# Altium PCB Machsac.PcbDoc
Units mil, origin at the board's own origin, x right, y up, seen from the top; angles counter-clockwise.
Board outline 6000 x 4000 mil, 2 copper layers (Top Layer, Bottom Layer); 41 components, 15 nets, 97 pads, 1 vias.
Unrouted connection lines stored in the file: 12.
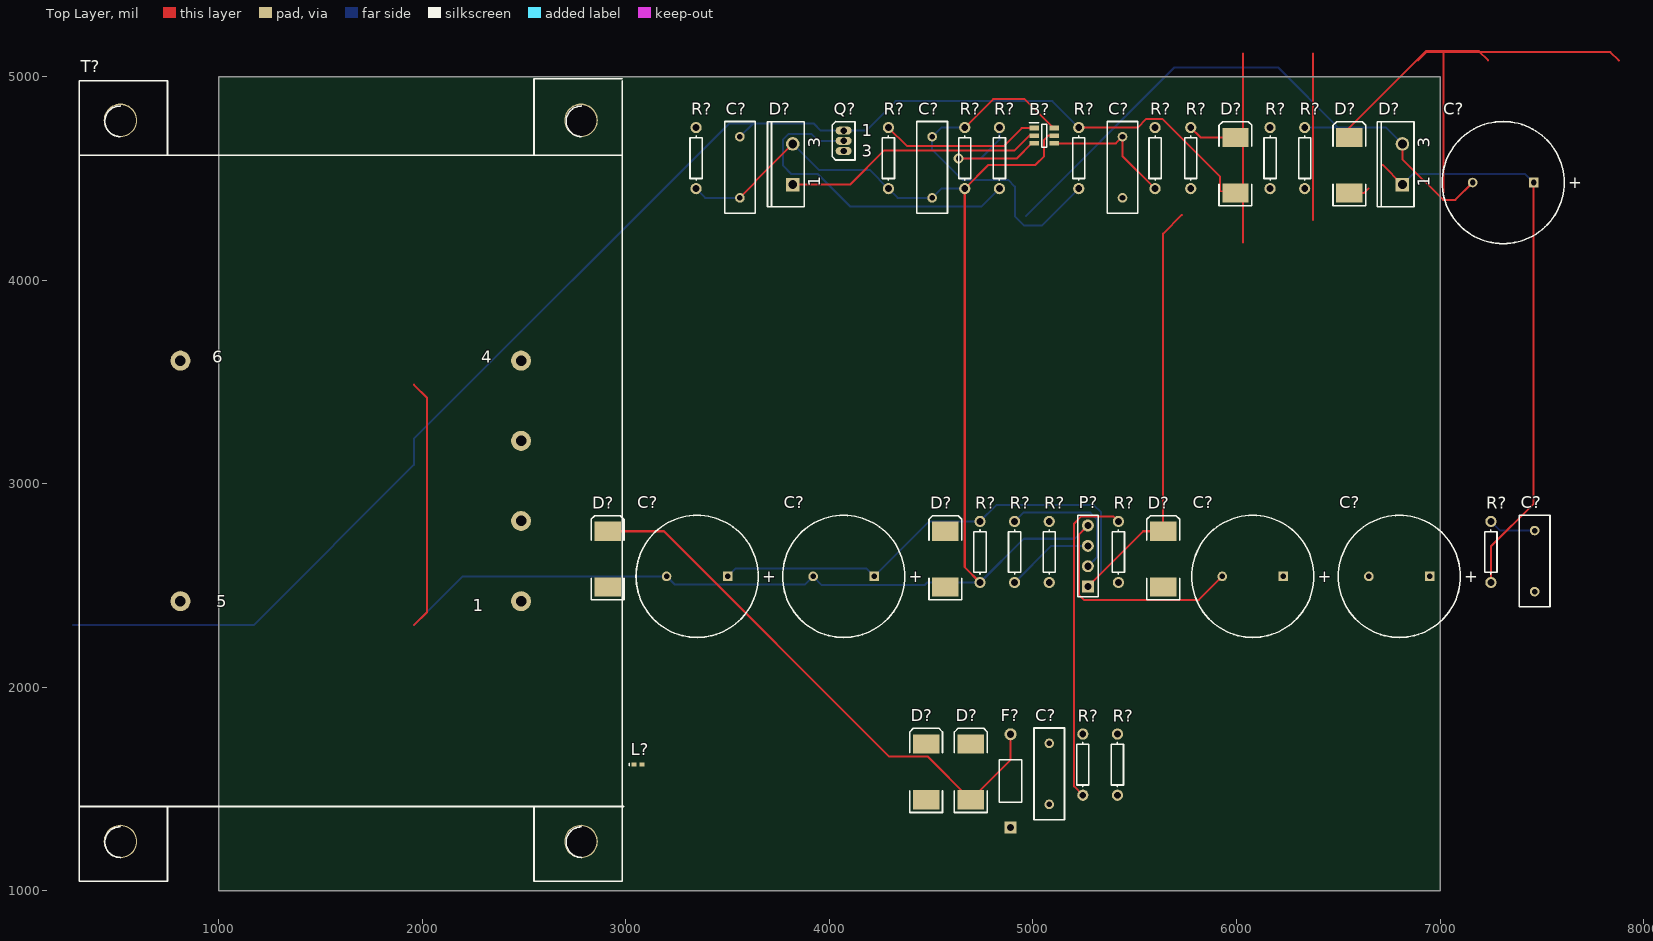
[diagram p0: Top Layer view]
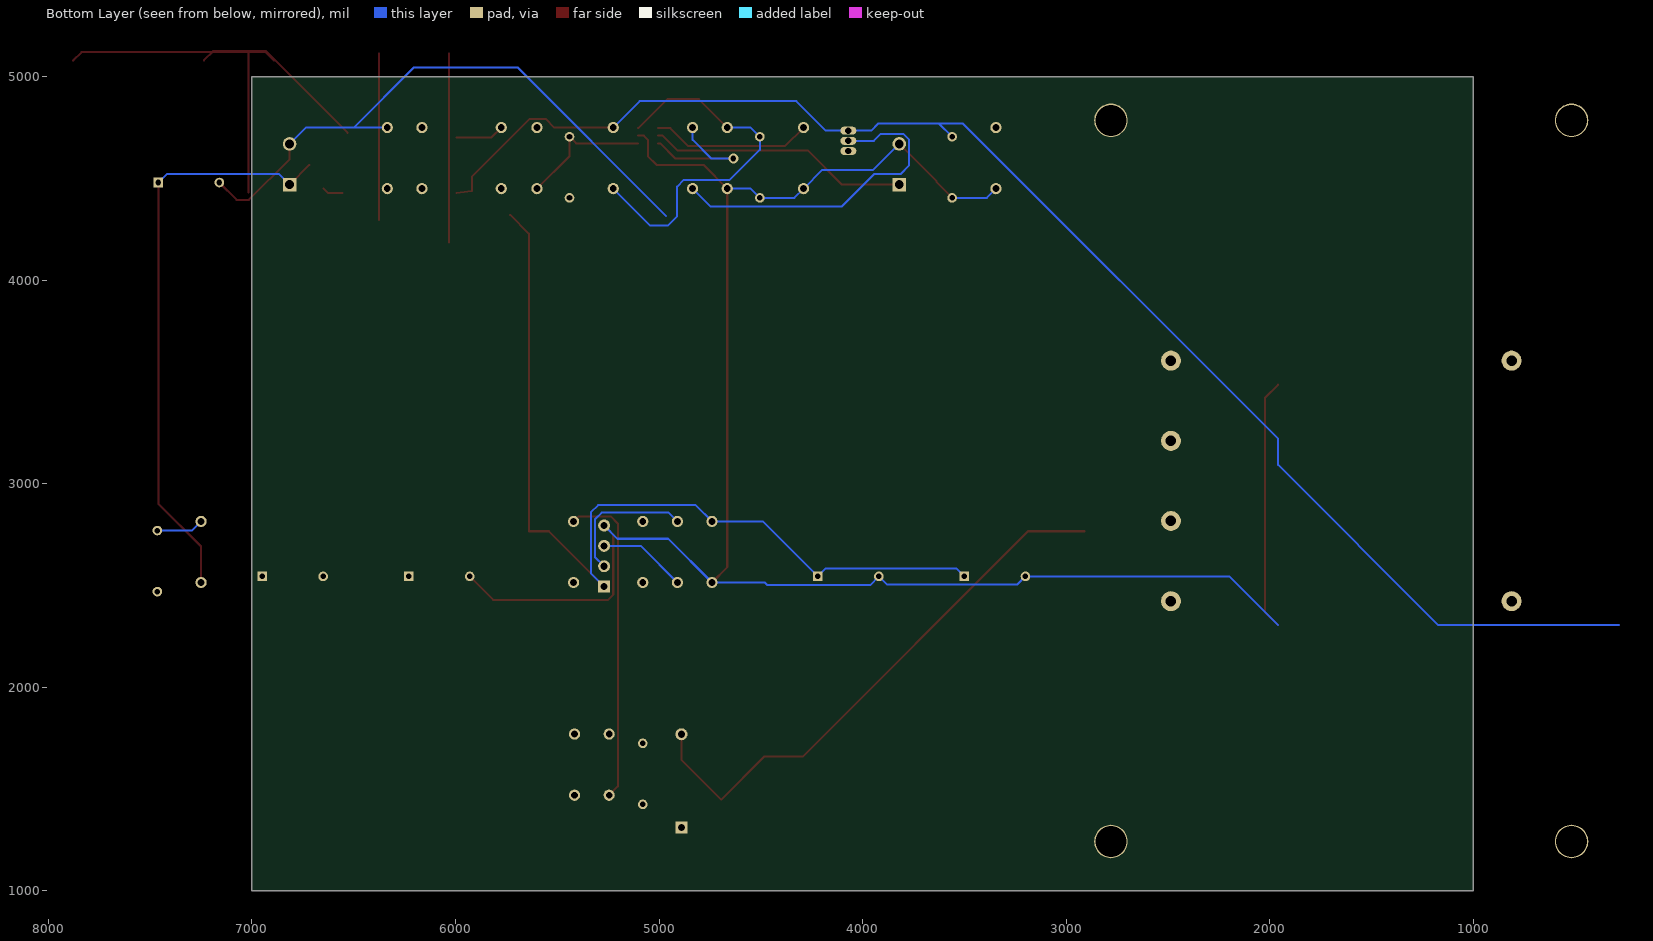
[diagram p1: Bottom Layer view, seen from below]

## Layer stack, top to bottom
Top Solder: solder mask 0.4, Solder Resist, Dk 3.5
Top Layer: signal copper 1.4
Dielectric 1: dielectric 12.6, FR-4, Dk 4.8
Bottom Layer: signal copper 1.4
Bottom Solder: solder mask 0.4, Solder Resist, Dk 3.5

## Board outline
1000,1000 7000,1000 7000,5000 1000,5000

## Design rules (kind name [scope] priority, off if disabled: settings)
Clearance [All] p1: gap=10 ignorepadtopadclearanceinfootprint=FALSE except(0: Arc-Hole Track-Hole SMDPad-Hole THPad-Hole Via-Hole Fill-Hole Poly-Hole Region-Hole Text-Hole)
PolygonConnect [All] p1: connectstyle=Relief reliefconductorwidth=10 reliefentries=4 polygonreliefangle="90 Angle" airgapwidth=10
RoomDefinition Machsac [InComponentClass('Machsac')] p1: confinementstyle=ConfineIn formatcopy=TRUE lockcomponents=FALSE outline 80,900 7860,900 7860,5130 80,5130
RoutingVias [All] p1: holewidth=28 width=50 viastyle="Through Hole" minholewidth=28 minwidth=50 maxholewidth=28 maxwidth=50
SolderMaskExpansion [All] p1: expansion=4 istentingtop=FALSE
Width [All] p1: maxlimit=10 minlimit=10 preferedwidth=10
30 further rules are at their usual default settings.

## Classes and differential pairs
component class Machsac: B? C? D? F? L? P? Q? R? T?

## Components (designator, comment, footprint, x,y, rotation, side; value= is the part's Value field where it differs from the comment)
B? "UCC28700DBVT" SOT95P280X145-6N 5055,4710 r0 top
C? "Cap Pol1" RB7.6-15 6800,2545 r0 top value=100pF
C? "Cap" RAD-0.3 3560,4555 r90 top value=100pF
C? "Cap" RAD-0.3 7465,2620 r90 top value=100pF
C? "Cap" RAD-0.3 5080,1575 r90 top value=100pF
C? "Cap" RAD-0.3 5440,4555 r90 top value=100pF
C? "" RB7.6-15 3350,2545 r0 top value=100pF
C? "" RB7.6-15 7310,4480 r0 top value=100pF
C? "" RB7.6-15 4070,2545 r0 top value=100pF
C? "Cap" RAD-0.3 4505,4555 r90 top value=100pF
C? "Cap Pol1" RB7.6-15 6080,2545 r0 top value=100pF
D? "Diode" SMC 2910,2630 r90 top
D? "Diode" SMC 4475,1585 r90 top
D? "DIODE" TO-220AC 3820,4570 r90 top
D? "Diode" SMC 4695,1585 r90 top
D? "DIODE" TO-220AC 6815,4570 r90 top
D? "Diode" SMC 6555,4565 r90 top
D? "Diode" SMC 5640,2630 r90 top
D? "Diode" SMC 5995,4565 r90 top
D? "Diode" SMC 4570,2630 r90 top
F? "Fuse 2" PIN-W2/E2.8 4890,1540 r90 top
L? "Inductor" 0402-A 3060,1620 r0 top value=10mH
P? "Header 4" HDR1X4 5270,2495 r90 top
Q? "AOU1N60" E3 4070,4685 r0 top
R? "Res1" AXIAL-0.3 4290,4600 r90 top value=1K
R? "Res1" AXIAL-0.3 3345,4600 r90 top value=1K
R? "Res1" AXIAL-0.3 5080,2665 r90 top value=1K
R? "Res1" AXIAL-0.3 4835,4600 r90 top value=1K
R? "Res1" AXIAL-0.3 4910,2665 r90 top value=1K
R? "Res1" AXIAL-0.3 6165,4600 r90 top value=1K
R? "Res1" AXIAL-0.3 5600,4600 r90 top value=1K
R? "Res1" AXIAL-0.3 5420,2665 r90 top value=1K
R? "Res1" AXIAL-0.3 4740,2665 r90 top value=1K
R? "Res1" AXIAL-0.3 5415,1620 r90 top value=1K
R? "Res1" AXIAL-0.3 7250,2665 r90 top value=1K
R? "Res1" AXIAL-0.3 4665,4600 r90 top value=1K
R? "Res1" AXIAL-0.3 5225,4600 r90 top value=1K
R? "Res1" AXIAL-0.3 5245,1620 r90 top value=1K
R? "Res1" AXIAL-0.3 5775,4600 r90 top value=1K
R? "Res1" AXIAL-0.3 6335,4600 r90 top value=1K
T? "Trans3" TRF_6 1648.33,3014.17 r0 top

## Footprints (in the part's own frame and the unit in brackets; to place one, negate y for a bottom-side part, rotate by r counter-clockwise, add the part's x,y. Pads: shape width x height; smd on the part's side, far side on the other; paste and mask are expansions set on the pad)
0402-A [mm] "Chip Inductor, Body 1.0x0.5mm, IPC High Density"
  rect 0.6x0.5 smd: 1(-0.5,0) 2(0.5,0)
  silkscreen extent -1.1,-0.15 -1.1,0.15, body extent -0.55,-0.3 0.55,0.3, height 0.55
AXIAL-0.3 [mm] "Axial Device, Thru-Hole; 2 Leads; 0.3 in Pin Spacing"
  round 1.4 hole 0.85: 1(-3.81,0) 2(3.81,0)
  silkscreen extent -2.77,-0.76 2.77,0.76
E3 [mm] "TO, Flat Index; 3 In-Line, Axial Leads; Body Dia. 4.6mm; Lead Dia. 0.5 mm (max)"
  oval 2x1 hole 0.8: 1(0,1.27) 2(0,0) 3(0,-1.27)
  silkscreen extent -1.41,-2.41 1.41,2.41
HDR1X4 [mm] "Connector; Header; 4 Position"
  rect 1.5x1.5 hole 0.9: 1(0,0)
  round 1.5 hole 0.9: 2(2.54,0) 3(5.08,0) 4(7.62,0)
  silkscreen extent -1.27,-1.27 8.89,1.27
PIN-W2/E2.8 [mm] "Thru-Hole; 2 Leads"
  rect 1.5x1.5 hole 0.9: 1(-5.825,0)
  round 1.5 hole 0.9: 2(5.825,0)
  silkscreen extent -2.65,-1.4 2.65,1.4
RAD-0.3 [mm] "Radial Cap, Thru-Hole; 2 Leads; 0.3 in Pin Spacing"
  round 1.2 hole 0.7: 1(-3.81,0) 2(3.81,0)
  silkscreen extent -5.71,-1.91 5.71,1.91
RB7.6-15 [mm] "Polarized Capacitor (Radial); 2 Leads"
  rect 1.2x1.2 hole 0.7: 1(3.81,0)
  round 1.2 hole 0.7: 2(-3.81,0)
  silkscreen extent -7.62,-7.62 7.62,7.62
SMC [mm] "DO-214-AB/SMC; 2 C-Bend Leads; Body 7.9 x 5.9 mm, inc. leads (LxW)"
  rect 2.4x3.3 smd: 1(-3.475,0) 2(3.475,0)
  silkscreen extent -5.08,-2.05 5.42,2.06
SOT95P280X145-6N [mm]
  rect 1.2x0.6 smd: 1(-1.25,0.95) 2(-1.25,0) 3(-1.25,-0.95) 4(1.25,-0.95) 5(1.25,0) 6(1.25,0.95)
  silkscreen extent -1.85,-1.45 0.3,1.6
TO-220AC [mm] "TO, Thru-Hole, Vertical, Heatsink Mounted; 3 In-Line Leads (1 Absent); Pitch 2.54 mm"
  rect 1.7x1.7 hole 1.1: 1(-2.54,0)
  round 1.7 hole 1.1: 3(2.54,0)
  silkscreen extent -5.3,-1.45 5.3,3.15
TRF_6 [mil] "Transformer; 6 Leads"
  round 98 hole 52: 1(836.67,-590.83) 2(836.67,-196.67) 3(836.67,196.67) 4(836.67,590.83) 5(-836.67,-590.83) 6(-836.67,590.83)
  round 165 hole 152: MH1(-1131.67,-1771.67) MH2(1131.67,-1771.67) MH3(1131.67,1771.67) MH4(-1131.67,1771.67)
  silkscreen extent -1333,-1967 1342,1975

## Part data
B?: "Texas Instruments UCC28700DBVT, PWM Controller, 140 kHz, 6-Pin, SOT-23", Manufacturer_Name="Texas Instruments", Mouser Part Number=595-UCC28700DBVT, Arrow Part Number=UCC28700DBVT, Arrow Price/Stock=https://www.arrow.com/en/products/ucc28700dbvt/texas-instruments?region=nac, Datasheet Link=http://www.ti.com/lit/gpn/ucc28700, Geometry.Height=1.45mm, Manufacturer_Part_Number=UCC28700DBVT, Mouser Price/Stock=https://www.mouser.co.uk/ProductDetail/Texas-Instruments/UCC28700DBVT?qs=4whTb%2F0XQMhVrkFqriHNXg%3D%3D
C? C?: "Polarized Capacitor (Radial)", LatestRevisionDate=17-Jul-2002, LatestRevisionNote="Re-released for DXP Platform.", PackageDescription="Polarized Capacitor (Radial); 2 Leads", PackageReference=RB7.6-15, Published=8-Jun-2000, Publisher="Altium Limited"
C? C? C? C? C?: "Capacitor", LatestRevisionDate=17-Jul-2002, LatestRevisionNote="Re-released for DXP Platform.", PackageDescription="Radial Cap, Thru-Hole; 2 Leads; 0.3 in Pin Spacing", PackageReference=RAD-0.3, Published=8-Jun-2000, Publisher="Altium Limited"
C? C? C?: library part "Cap Pol1", "Polarized Capacitor (Radial)", LatestRevisionDate=17-Jul-2002, LatestRevisionNote="Re-released for DXP Platform.", PackageDescription="Polarized Capacitor (Radial); 2 Leads", PackageReference=RB7.6-15, Published=8-Jun-2000, Publisher="Altium Limited"
D? D? D? D? D? D? D?: "Default Diode", Code_JEDEC=DO-214-AB, LatestRevisionDate=17-Jul-2002, LatestRevisionNote="Re-released for DXP Platform.", PackageDescription="DO-214-AB/SMC; 2 C-Bend Leads; Body 7.9 x 5.9 mm, inc. leads (LxW)", PackageReference=SMC, PackageVersion=Sep-1996, Published=8-Jun-2000, Publisher="Altium Limited"
D? D?: library part "Diode 10TQ035", "Schottky Rectifier", ComponentLink1Description="Manufacturer Link", ComponentLink1URL=http://www.irf.com/, ComponentLink2Description=Datasheet, ComponentLink2URL=http://www.irf.com/product-info/datasheets/data/10tq.pdf, DatasheetVersion=PD-2.057B, LatestRevisionDate=17-Jul-2002, LatestRevisionNote="Re-released for DXP Platform.", Note="Terminal 2 is the TAB and is electrically connected to the cathode", PackageDescription="TO, Thru-Hole, Vertical, Heatsink Mounted; 3 In-Line Leads (1 Absent); Pitch 2.54 mm", PackageReference=TO-220AC, PackageVersion=Feb-1998, Published=8-Jun-2000, Publisher="Altium Limited"
F?: "Fuse", LatestRevisionDate=17-Jul-2002, LatestRevisionNote="Re-released for DXP Platform.", PackageDescription="Thru-Hole; 2 Leads", PackageReference=PIN-W2/E2.8, Published=8-Jun-2000, Publisher="Altium Limited"
P?: "Header, 4-Pin", LatestRevisionDate=17-Jul-2002, LatestRevisionNote="Re-released for DXP Platform.", Publisher="Altium Limited"
Q?: library part MOSFET-N, "N-Channel MOSFET", LatestRevisionDate=17-Jul-2002, LatestRevisionNote="Re-released for DXP Platform.", PackageDescription="TO, Flat Index; 3 In-Line, Axial Leads; Body Dia. 4.6mm; Lead Dia. 0.5 mm (max)", PackageReference=E3, PackageVersion=1995/1996, Published=8-Jun-2000, Publisher="Altium Limited"
R? R? R? R? R? R? R? R? R? R? R? R? R? R? R? R?: "Resistor", LatestRevisionDate=17-Jul-2002, LatestRevisionNote="Re-released for DXP Platform.", PackageDescription="Axial Device, Thru-Hole; 2 Leads; 0.3 in Pin Spacing", PackageReference=AXIAL-0.3, Published=8-Jun-2000, Publisher="Altium Limited"
T?: "Three-winding Transformer (Non-Ideal)", LatestRevisionDate=17-Jul-2002, LatestRevisionNote="Re-released for DXP Platform.", PackageDescription="Transformer; 6 Leads", PackageReference=TRF_6, Published=25-Jan-2001, Publisher="Altium Limited", Sim Note="Enter the turns ratios, Core loss resistance, Magnetising Reactance, Leakage Reactances and Resistances referred to the primary side into the parameter fields."
L?: Code_IEC=1005, Code_JEITA=0402, LatestRevisionDate=29-May-2009, LatestRevisionNote="IPC-7351 Footprint Added.", PackageDescription="Chip Inductor", PackageReference=0402-A, Published=8-Jun-2000, Publisher="Altium Limited"

## Via types
v1: diameter 50, hole 28, Top Layer to Bottom Layer, 1 vias

## Nets (pads, with @x,y where several pads share a name; then routed paths per layer and width w, separated by ;. In a path a pad name is that pad's centre, name@x,y a point inside that pad or via, vN(x,y) a via of type N, cw(c..) or ccw(c..) an arc to the next point about the centre after c; other vN are vias at no path point)
A1: C?.2@3560,4705 D?.1@5995,4428.19 D?.1@6555,4428.19 Q?.1 R?.2@5225,4750 T?.3 T?.5 | length 9045.5
  Top Layer w10: R?.2@5225,4750 5514,4750 5557,4793 5636,4793 5669.5,4759.5 5920,4509 5920,4438.19 D?.1@5995,4428.19 ; 6376,4296.19 6376,5115 ; 6529.5,4724.5 6930,5125 7191,5125 7236,5080 ; D?.1@6555,4428.19 6626.19,4428.19 6648,4450
  Bottom Layer w10: 285,2305.15 1170.83,2305.15 1958.33,3092.64 1958.33,3221.31 3507.02,4770 3625,4770 ; C?.2@3560,4705 3625,4770 ; R?.2@5225,4750 5095,4880 4325,4880 4180,4735 Q?.1 3958,4735 3923,4770 3625,4770
GND: B?.5 C?.1@3560,4405 C?.1@4505,4405 C?.2@3200,2545 C?.2@3920,2545 C?.2@5930,2545 C?.2@7160,4480 D?.3 P?.4 R?.1@3345,4450 R?.1@4290,4450 R?.1@4665,4450 R?.1@4740,2515 R?.2@6335,4750 T?.1 T?.4 | length 13089.7
  Top Layer w10: 1958.33,2305.15 2023,2369.81 2023,3422.14 1958.33,3486.81 ; C?.1@3560,4405 3638,4483 3638,4488 D?.3@3820,4670 ; R?.1@4740,2515 4665,2590 4665,4450 4781,4566 5011,4566 5055,4610 5055,4690 5075,4710 B?.5 ; P?.4 5225,2750 5225,2455 5250,2430 5815,2430 C?.2@5930,2545 ; D?.3@6815,4670 6815,4595 7015,4395 7075,4395 C?.2@7160,4480
  Bottom Layer w10: 1958.33,2305.15 2198.19,2545 3200,2545 3239,2506 3881,2506 3920,2545 3963,2502 4467,2502 4480,2515 4740,2515 4955,2730 5205,2730 P?.4 ; R?.1@3345,4450 3390,4405 C?.1@3560,4405 ; D?.3@3820,4670 3947.84,4542.16 4197.84,4542.16 4290,4450 4335,4405 4505,4405 4550,4450 R?.1@4665,4450 ; 4965,4315 5695,5045 6205,5045 6500,4750 ; R?.2@6335,4750 6500,4750 ; D?.3@6815,4670 6735,4750 6500,4750
NetB?_1: B?.1 R?.2@4290,4750 | length 790.5
  Top Layer w10: R?.2@4290,4750 4381.45,4658.55 4856.14,4658.55 4945,4747.4 B?.1
NetB?_2: B?.2 D?.1@3820,4470 | length 1285.2
  Top Layer w10: D?.1@3820,4470 4101,4470 4269,4638 4910,4638 4982,4710 B?.2
NetB?_3: B?.3 R?.2@4835,4750 | length 699.8
  Top Layer w10: v1(4635,4598) 4919.4,4598 4994,4672.6 B?.3
  Bottom Layer w10: v1(4635,4598) 4743,4598 4835,4690 R?.2@4835,4750
NetB?_4: B?.4 C?.2@5440,4705 R?.1@5600,4450 | length 670.5
  Top Layer w10: B?.4 5407.6,4672.6 5440,4705 5440,4610 R?.1@5600,4450
NetB?_6: B?.6 C?.2@4505,4705 R?.1@5225,4450 R?.2@4665,4750 | length 1833.7
  Top Layer w10: R?.2@4665,4750 4805,4890 4959,4890 5101.6,4747.4 B?.6
  Bottom Layer w10: R?.2@4665,4750 4550,4750 4505,4705 4505,4641 4653,4493 4878,4493 4911,4460 4911,4315 4958,4268 5043,4268 R?.1@5225,4450
NetC?_1: C?.1@3500,2545 C?.1@4220,2545 C?.1@7460,4480 D?.1@6815,4470 D?.2@5640,2766.81 P?.1 R?.1@7250,2515 R?.2@4740,2815 | length 9998.5
  Top Layer w10: P?.1 5541.81,2766.81 5640,2766.81 5640,4229 5732,4321 ; 6032,4186 6032,5115 ; 6718,4567 D?.1@6815,4470 ; 6892,5080 6933,5121 7837,5121 7878,5080 ; 7018,4432 7018,5115 ; R?.1@7250,2515 7250,2692 7460,2902 C?.1@7460,4480
  Bottom Layer w10: C?.1@3500,2545 3539,2584 4181,2584 4220,2545 4490,2815 4740,2815 4820,2895 5299.06,2895 5334.53,2859.53 5334.53,2559.53 P?.1 ; D?.1@6815,4470 6868,4523 7417,4523 C?.1@7460,4480
NetC?_2: C?.2@7465,2770 R?.2@7250,2815 | length 233.6
  Bottom Layer w10: R?.2@7250,2815 7295,2770 C?.2@7465,2770
NetD?_1: D?.1@4695,1448.19 D?.2@2910,2766.81 F?.2 | length 2733.1
  Top Layer w10: D?.2@2910,2766.81 3187.19,2766.81 4295,1659 4484.19,1659 4695,1448.19 4890,1643.19 F?.2
NetD?_2: D?.2@5995,4701.81 R?.2@5775,4750 | length 240
  Top Layer w10: R?.2@5775,4750 5823.19,4701.81 D?.2@5995,4701.81
NetP?_2: P?.2 R?.2@4910,2815 | length 684.5
  Bottom Layer w10: R?.2@4910,2815 4953,2858 5281.53,2858 5314.53,2825 5314.53,2639.53 P?.2
NetP?_3: P?.3 R?.1@4910,2515 | length 434.6
  Bottom Layer w10: R?.1@4910,2515 5090,2695 P?.3
NetQ?_2: Q?.2 R?.1@4835,4450 | length 1634.4
  Bottom Layer w10: Q?.2 3945,4685 3911,4719 3800,4719 3771,4690 3771,4564 3813,4522 3942,4522 4101,4363 4748,4363 R?.1@4835,4450
NetR?_1: R?.1@5245,1470 R?.2@5420,2815 | length 1595.7
  Top Layer w10: R?.1@5245,1470 5202,1513 5202,2805 5237,2840 5395,2840 R?.2@5420,2815
pads on no net: C?.1@5080,1425 C?.1@5440,4405 C?.1@6230,2545 C?.1@6950,2545 C?.1@7465,2470 C?.2@5080,1725 C?.2@6650,2545 D?.1@2910,2493.19 D?.1@4475,1448.19 D?.1@4570,2493.19 D?.1@5640,2493.19 D?.2@4475,1721.81 D?.2@4570,2766.81 D?.2@4695,1721.81 D?.2@6555,4701.81 F?.1 L?.1 L?.2 Q?.3 R?.1@5080,2515 R?.1@5415,1470 R?.1@5420,2515 R?.1@5775,4450 R?.1@6165,4450 R?.1@6335,4450 R?.2@3345,4750 R?.2@5080,2815 R?.2@5245,1770 R?.2@5415,1770 R?.2@5600,4750 R?.2@6165,4750 T?.2 T?.6 T?.MH1 T?.MH2 T?.MH3 T?.MH4

## Text inside footprints (layer, text, board x,y; h text height)
C?: Top Overlay "+" at 7120.15,2515.99 h59.06
C?: Top Overlay "+" at 3670.15,2515.99 h59.06
C?: Top Overlay "+" at 7630.15,4450.99 h59.06
C?: Top Overlay "+" at 4390.15,2515.99 h59.06
C?: Top Overlay "+" at 6400.15,2515.99 h59.06
D?: Top Overlay "1" at 3954.84,4460.16 h59.06 r90; Top Overlay "3" at 3954.84,4650.31 h59.06 r90
D?: Top Overlay "1" at 6949.84,4460.16 h59.06 r90; Top Overlay "3" at 6949.84,4650.31 h59.06 r90
Q?: Top Overlay "1" at 4159.57,4706.85 h59.05; Top Overlay "3" at 4159.57,4607.72 h59.05
T?: Top Overlay "6" at 968.33,3594.17 h59.06; Top Overlay "4" at 2288.33,3594.17 h59.06; Top Overlay "1" at 2248.33,2374.17 h59.06; Top Overlay "5" at 988.33,2394.17 h59.06